# Altium PCB SLMVR_REVTT.PcbDoc
Units mil, origin at the board's own origin, x right, y up, seen from the top; angles counter-clockwise.
Board outline 1968.5 x 1968.5 mil, 2 copper layers (Top Layer, Bottom Layer); 72 components, 47 nets, 259 pads, 196 vias.
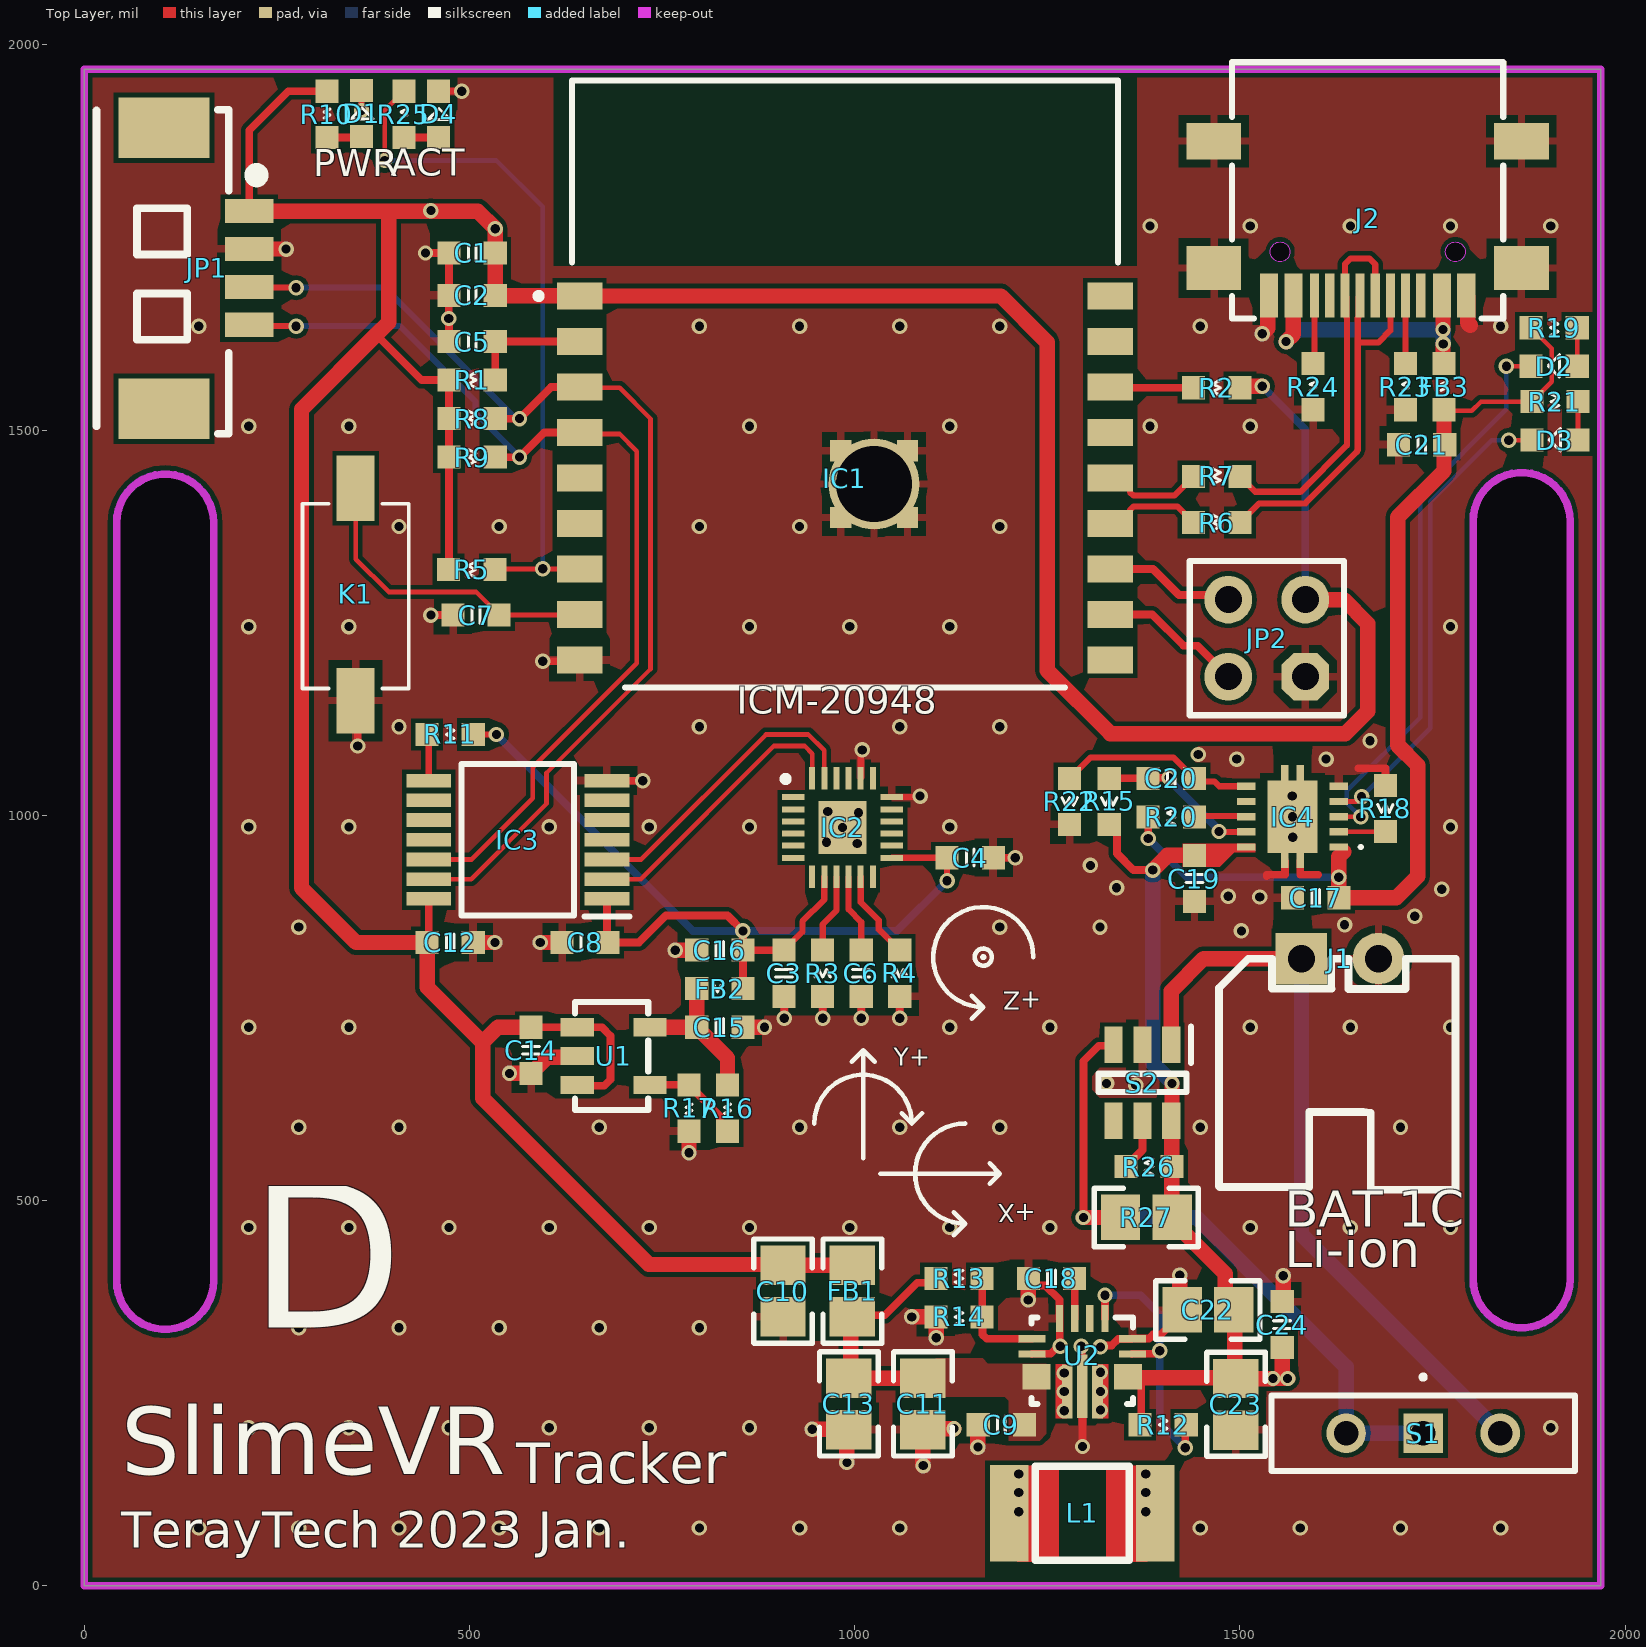
[diagram p0: Top Layer view]
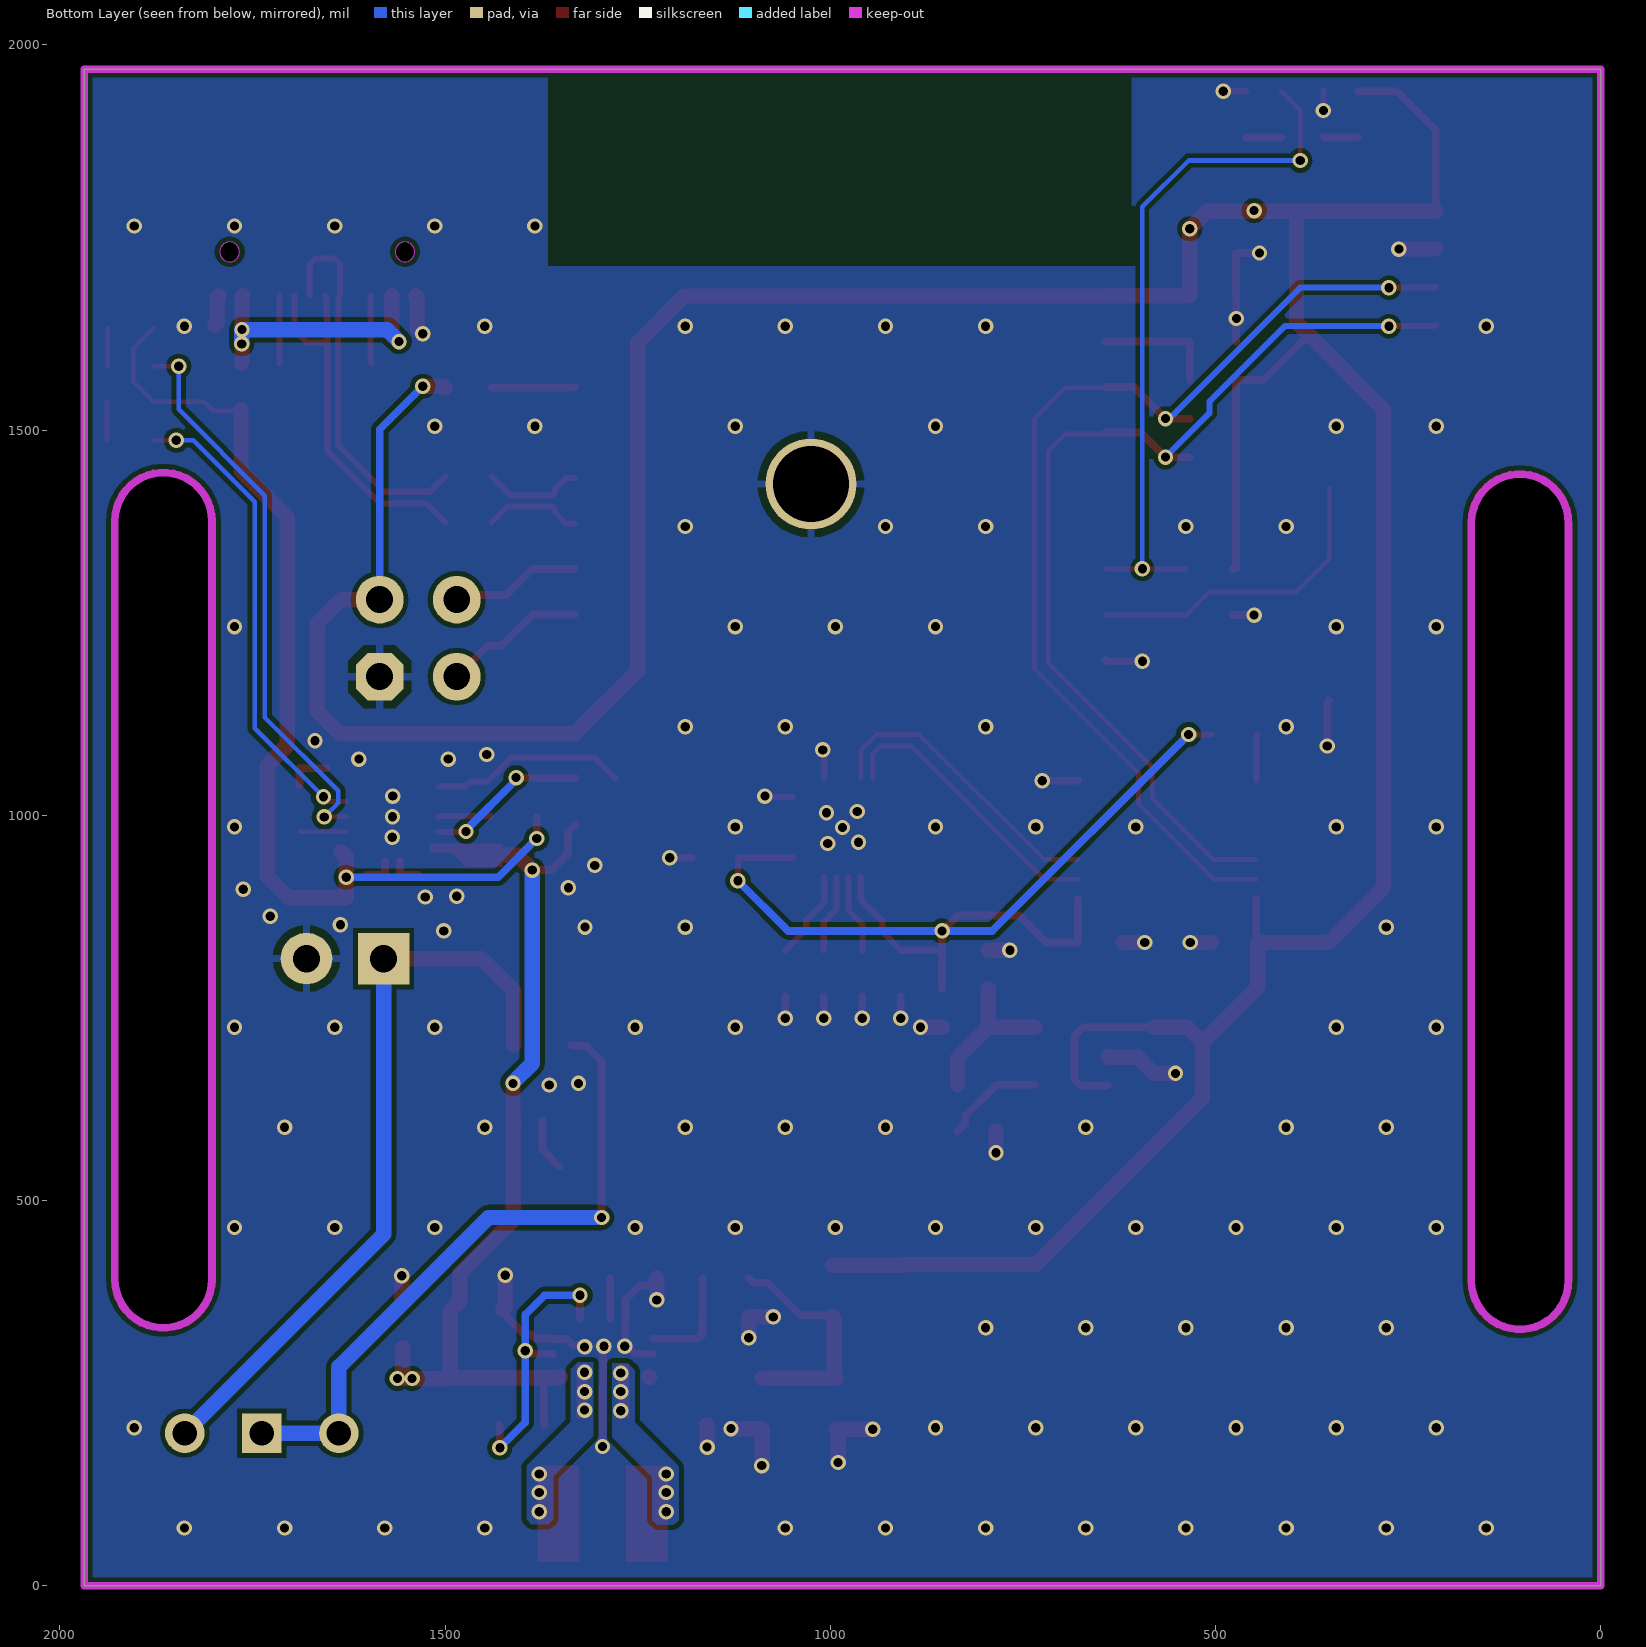
[diagram p1: Bottom Layer view, seen from below]
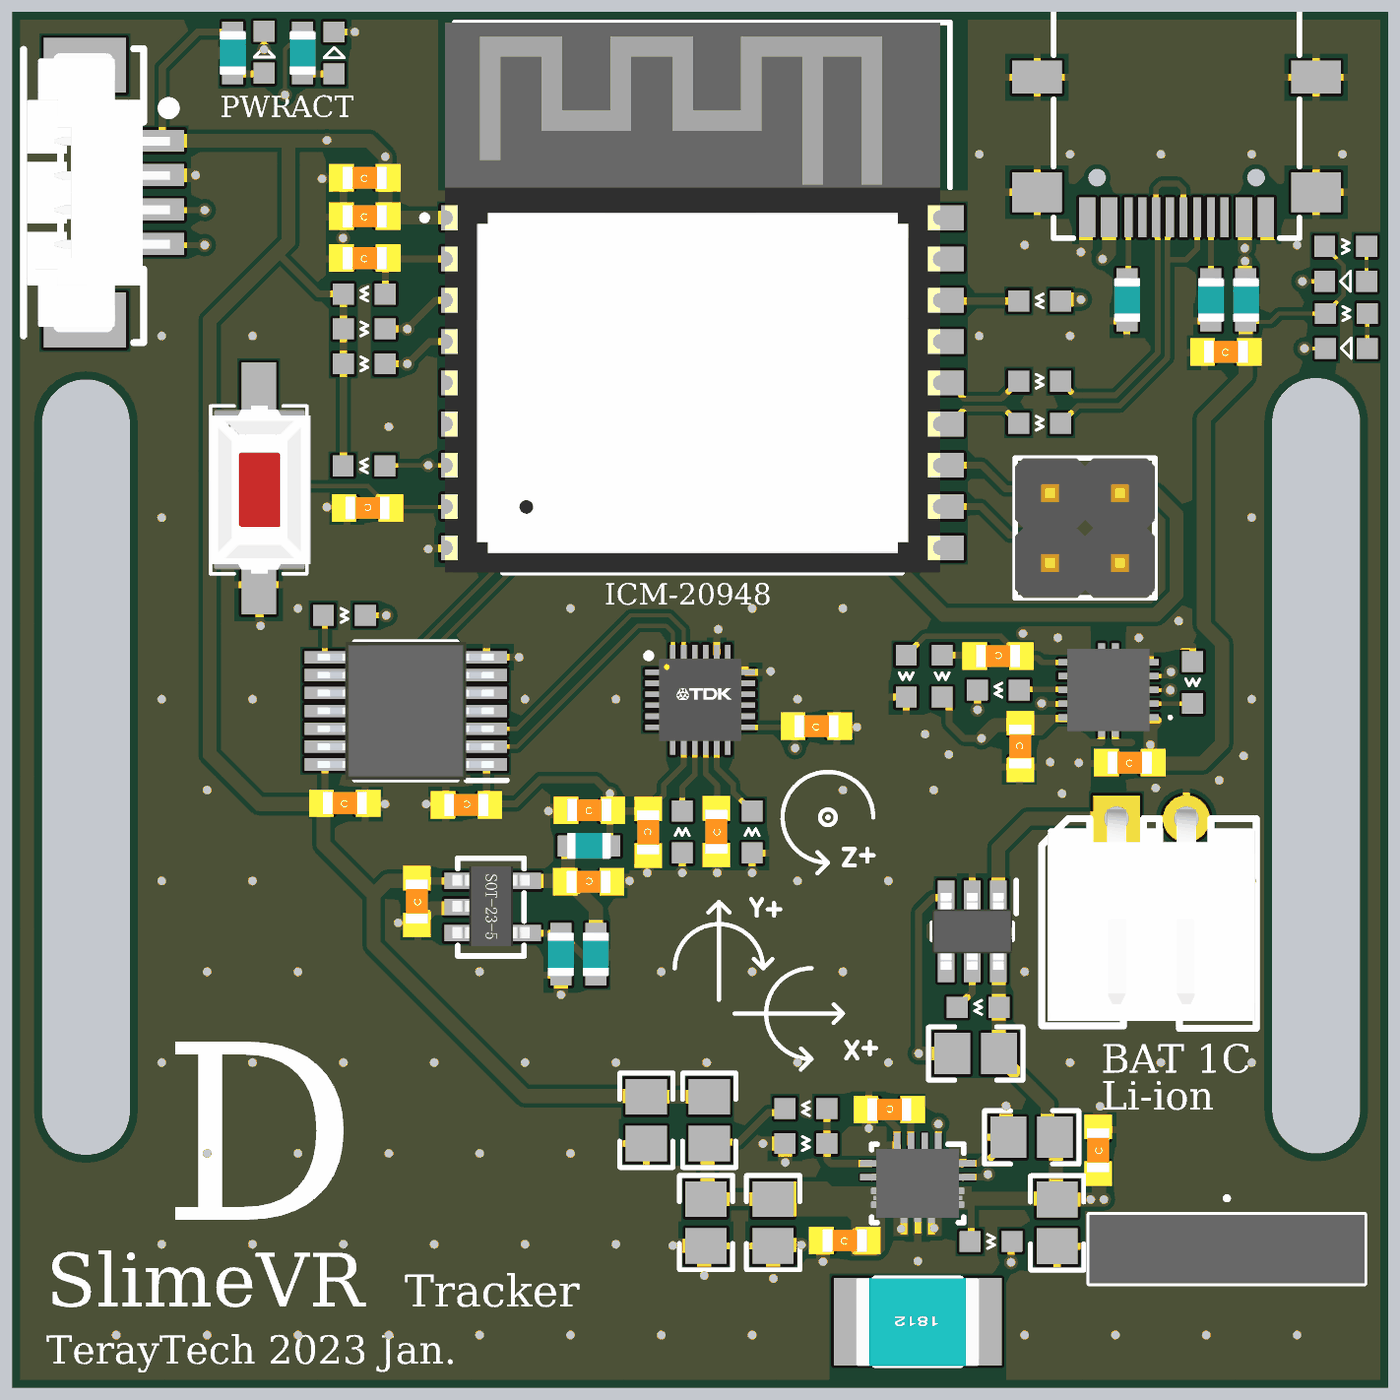
[diagram p2: 3D render of the assembled board from above, using the file's embedded part models]

## Layer stack, top to bottom
Top Solder: solder mask 0.4, Solder Resist, Dk 3.5
Top Layer: signal copper 1.4
Dielectric 1: dielectric 12.6, FR-4, Dk 4.8
Bottom Layer: signal copper 1.4
Bottom Solder: solder mask 0.4, Solder Resist, Dk 3.5

## Board outline
0,0 1968.5,0 1968.5,1968.5 0,1968.5
cut-out: 1802.8,397.7 ccw(c1865.79,397.7) 1928.78,397.7 1928.78,1381.95 ccw(c1865.79,1381.95) 1802.8,1381.95
cut-out: 42.01,395.75 ccw(c105,395.75) 167.99,395.75 167.99,1380 ccw(c105,1380) 42.01,1380

## Design rules (kind name [scope] priority, off if disabled: settings)
Clearance [All] p1: gap=6 ignorepadtopadclearanceinfootprint=TRUE except(0: Arc-Hole Track-Hole SMDPad-Hole THPad-Hole Via-Hole Fill-Hole Poly-Hole Region-Hole Text-Hole; 10: Arc-Text Track-Text SMDPad-Text THPad-Text Via-Text Fill-Text Poly-Text Region-Text Text-Text)
ComponentClearance [All] p1 off: gap=10 collisioncheckmode=3 verticalgap=10 showdistances=FALSE
PolygonConnect PolygonConnect_1VIA [IsVia] p1: connectstyle=Direct reliefconductorwidth=10 reliefentries=4 polygonreliefangle="90 Angle" airgapwidth=10
PolygonConnect [All] p2: connectstyle=Relief reliefconductorwidth=10 reliefentries=4 polygonreliefangle="90 Angle" airgapwidth=10
RoutingVias [All] p1: holewidth=28 width=50 viastyle="Through Hole" minholewidth=12 minwidth=20 maxholewidth=28 maxwidth=50
SolderMaskExpansion [All] p1: expansion=4 istentingtop=FALSE
Width [All] p1: maxlimit=20 minlimit=6 preferedwidth=10 minimp=50.000000 maximp=50.000000 favimp=50.000000
29 further rules are at their usual default settings.

## Components (designator, comment, footprint, x,y, rotation, side; value= is the part's Value field where it differs from the comment)
C1 "0.1uF" 0603_C 503.5,1730 r0 top value=104
C2 "0.1uF" 0603_C 503.5,1675 r0 top value=104
C3 "0.1uF" 0603_C 908.5,795 r270 top value=104
C4 "0.1uF" 0603_C 1150,945 r0 top value=104
C5 "1uF" 0603_C 503.5,1615 r0 top value=104
C6 "0.1uF" 0603_C 1008.5,795 r90 top value=104
C7 "0.1uF" 0603_C 508.5,1260 r180 top value=104
C8 "0.1uF" 0603_C 650,835 r180 top value=104
C9 "10uF" 0603_C 1190.5,209 r0 top value=104
C10 "10uF" 0805 907,382.46 r90 top value=104
C11 "22uF" 0805 1088.5,236 r90 top value=104
C12 "0.1uF" 0603_C 475,835 r0 top value=104
C13 "22uF" 0805 992.5,236 r90 top value=104
C14 "2.2uF" 0603_C 580,695 r90 top value=104
C15 "2.2uF" 0603_C 825,725 r180 top value=104
C16 "1uF" 0603_C 825,825 r0 top value=104
C17 "4.7uF" 0603_C 1598.5,893 r0 top value=104
C18 "0.1uF" 0603_C 1255.5,399 r180 top value=104
C19 "1uF" 0603_C 1441,918 r270 top value=104
C20 "0.47uF" 0603_C 1411,1048 r180 top value=104
C21 "2.2uF" 0603_C 1736,1481 r0 top value=104
C22 "10uF" 0805 1458.54,358 r0 top value=104
C23 "10uF" 0805 1495,235.54 r90 top value=104
C24 "1uF" 0603_C 1555,339 r90 top value=104
D1 "黄" 0603_LED 360,1910 r90 top
D2 "红" 0603_LED 1909,1583 r180 top
D3 "绿" 0603_LED 1910,1487 r180 top
D4 "蓝" 0603_LED 460,1909 r90 top
FB1 "600Ω @ 100MHz" 0805 997,382.46 r90 top
FB2 "600Ω @ 100MHz" 0603 825,775 r0 top
FB3 "600Ω @ 100MHz" 0603 1765,1556.5 r270 top
IC1 "ESP32-C3-WROOM-02-N4" ESP32C3WROOM02N4 1025.2,1430 r0 top
IC2 "ICM-20948" QFN40P300X300X105-25N-D 984.25,984.25 r0 top
IC3 "LSF0204PWR" SOP65P640X120-14N 562.79,968.35 r180 top
IC4 "BQ24060DRCT" BQ24060DRCT 1568.39,998.32 r180 top
J1 "2PIN" XH2.54-WI-2P 1630,814 r0 top
J2 "USB_TYPEC_2.0" USB_TYPEC_2.0_Horizontal_SMT 1665.96,1875.2 r180 top
JP1 "MX1.25 4PIN" "MX 1.25-WS-4P" 103.5,1710 r270 top
JP2 "Header 2.54 2x2" header2X2 1585,1180 r90 top
K1 "KEY" KEY_2 368.5,1295 r270 top
L1 "INDUCTOR" "L 1812" 1295.5,94 r180 top value=1.5uH
R1 "10K" 0603_R 503.5,1565 r0 top value=1K
R2 "10K" 0603_R 1470,1555 r0 top value=1K
R3 "10K" 0603_R 958.5,795 r270 top value=1K
R4 "10K" 0603_R 1058.5,795 r270 top value=1K
R5 "10K" 0603_R 503,1319 r0 top value=1K
R6 "0R" 0603_R 1470,1380 r180 top value=1K
R7 "0R" 0603_R 1470,1440 r180 top value=1K
R8 "4.7K" 0603_R 503.5,1515 r180 top value=1K
R9 "4.7K" 0603_R 503.5,1465 r180 top value=1K
R10 "10K" 0603 315,1910 r270 top value=1K
R11 "10K" 0603_R 475,1105 r180 top value=1K
R12 "10K" 0603_R 1400.5,209 r180 top value=1K
R13 "470K" 0603_R 1135.5,399 r0 top value=1K
R14 "150K" 0603_R 1135.5,349 r180 top value=1K
R15 "200R" 0603_R 1330.5,1018 r90 top value=1K
R16 "NC" 0603 835,620 r90 top value=1K
R17 "NC" 0603 785,620 r90 top value=1K
R18 "49.9K" 0603_R 1689,1009 r90 top value=1K
R19 "1.5K" 0603_R 1908,1633 r180 top value=1K
R20 "1K" 0603_R 1411,998 r0 top
R21 "1.5K" 0603_R 1909,1537 r180 top value=1K
R22 "1.13K" 0603_R 1279,1018 r90 top value=1K
R23 "5.1K" 0603 1715,1556.5 r270 top value=1K
R24 "5.1K" 0603 1595,1556.5 r270 top value=1K
R25 "10K" 0603 415,1910 r270 top value=1K
R26 "330R" 0603_R 1382,544 r0 top value=1K
R27 "NC" 0805 1378.54,478 r0 top value=1K
S1 "BSI-10" BSI10 1738,198 r180 top
S2 "TPS22810DBVR" SOT95P280X145-6N 1373.6,652.79 r270 top
U1 "RF LDO" SOT-23-5 689.98,688.5 r270 top
U2 "TPS63070RNMR" RNM0015A 1295.5,292 r270 top value=Value

## Footprints (in the part's own frame and the unit in brackets; to place one, negate y for a bottom-side part, rotate by r counter-clockwise, add the part's x,y. Pads: shape width x height; smd on the part's side, far side on the other; paste and mask are expansions set on the pad)
0603 [mil]
  rect 30x30 smd: 1(-30,0) 2(30,0)
  silkscreen extent -7,-4 5,4, body extent -31,-18 31,19, height 34
0603_C [mil] "Capacitor"
  rect 30x30 smd: 1(-30,0) 2(30,0)
  silkscreen extent -5,-11 5,11, body extent -51,-18 52,21, height 35
0603_LED [mil]
  rect 30x30 smd: 1(31,0) 2(-29,0)
  silkscreen extent -6,-15 9,14, body extent -31,-16 31,16, height 24
0603_R [mil]
  rect 30x30 smd: 1(-30,0) 2(30,0)
  silkscreen extent -5,-10 5,10, body extent -34,-19 34,19, height 39
0805 [mm] "0805 from SM-752 data"
  rect 1.3x1.5 smd: 1(-0.85,0) 2(0.85,0)
  silkscreen extent -1.72,-0.97 1.72,0.97, body extent -1.1,-0.72 1.1,0.72, height 1.45
BQ24060DRCT [mm]
  rect 0.6x0.24 smd: 1(-1.527,1) 2(-1.527,0.5) 3(-1.527,0) 4(-1.527,-0.5) 5(-1.527,-1) 6(1.527,-1) 7(1.527,-0.5) 8(1.527,0) 9(1.527,0.5) 10(1.527,1)
  rect 1.65x2.4 smd: 11(0,0)
  rect 0.25x0.5 smd: 12(-0.25,-1.45) 13(0.25,-1.45) 14(0.25,1.45) 15(-0.25,1.45)
  silkscreen extent -2.3,0.95 -2.2,1.05, body extent -1.5,-1.5 1.5,1.5, height 1.1
BSI10 [mm]
  rect 1.3x1.3 hole 0.8: 1(0,0)
  round 1.3 hole 0.8: 2(2.54,0) 3(-2.54,0)
  silkscreen extent -5,-1.9 5,1.25, body extent -5,-1.25 5,1.25, height 6.5
ESP32C3WROOM02N4 [mm]
  rect 1.5x0.9 smd: 1(-9.71,6.2) 2(-9.71,4.7) 3(-9.71,3.2) 4(-9.71,1.7) 5(-9.71,0.2) 6(-9.71,-1.3) 7(-9.71,-2.8) 8(-9.71,-4.3) 9(-9.71,-5.8) 10(7.79,-5.8) 11(7.79,-4.3) 12(7.79,-2.8) 13(7.79,-1.3) 14(7.79,0.2) 15(7.79,1.7) 16(7.79,3.2) 17(7.79,4.7) 18(7.79,6.2)
  rect 0.7x0.7 smd: 19(0,0) 20(1.1,0) 21(1.1,1.1) 22(0,1.1) 23(-1.1,1.1) 24(-1.1,0) 25(-1.1,-1.1) 26(0,-1.1) 27(1.1,-1.1)
  silkscreen extent -11.16,-6.7 8.04,13.3, body extent -10.31,-6.7 7.69,13.3, height 3.2
header2X2 [mil]
  oct 62x62 hole 35: 1(0,0)
  round 62 hole 35: 2(0,100) 3(100,0) 4(100,100)
  silkscreen extent -50,-50 150,150, body extent -50,-50 150,150, height 398
KEY_2 [mil] "贴片"
  rect 85x49.37 smd: 1(-129.57,-16.14) 2(146.02,-16.14)
  silkscreen extent -110,-85 130,53, body extent -110,-88 130,58
"L 1812" [mil] "小功率贴片电感"
  rect 50x125 smd: 1(-95,0) 2(95,0)
  silkscreen extent -61,-61 61,61, body extent -89,-63 89,63, height 59
"MX 1.25-WS-4P" [mm] "长：10.15mm，宽：4.2mm，高：3.4mm"
  rect 2x3 smd: 0(-4.632,0) 0(4.632,0)
  rect 0.8x1.6 smd: 1(-1.889,2.811) 2(-0.639,2.811) 3(0.611,2.811) 4(1.861,2.811)
  silkscreen extent -5.23,-2.23 5.45,3.25, body extent -5.07,-2.1 5.07,3.09, height 3.4
QFN40P300X300X105-25N-D [mm]
  rect 0.75x0.2 smd: 1(-1.627,1) 2(-1.627,0.6) 3(-1.627,0.2) 4(-1.627,-0.2) 5(-1.627,-0.6) 6(-1.627,-1) 13(1.627,-1) 14(1.627,-0.6) 15(1.627,-0.2) 16(1.627,0.2) 17(1.627,0.6) 18(1.627,1)
  rect 0.2x0.75 smd: 7(-1,-1.627) 8(-0.6,-1.627) 9(-0.2,-1.627) 10(0.2,-1.627) 11(0.6,-1.627) 12(1,-1.627) 19(1,1.627) 20(0.6,1.627) 21(0.2,1.627) 22(-0.2,1.627) 23(-0.6,1.627) 24(-1,1.627)
  rect 1.59x1.75 smd: 25(0,0)
  silkscreen extent -1.97,1.5 -1.78,1.7, body extent -1.5,-1.5 1.5,1.5, height 0.98
RNM0015A [mm]
  rect 0.889x0.24 smd paste+0 mask+0.051: 1(-1.397,0.75) 2(-1.397,0.25) 3(-1.397,-0.25) 4(-1.397,-0.75)
  rect 0.24x0.889 smd paste+0 mask+0.051: 5(-0.725,-1.651) 6(-0.225,-1.651) 14(-0.225,1.651) 15(-0.725,1.651)
  rect 0.85x0.7 smd paste-0.35 mask-0.356: 7(0.525,-1.4) 12(0.525,1.4)
  rect 0.85x0.889 smd paste-0.35 mask-0.356: 8(0.525,-1.524) 13(0.525,1.524)
  rect 1.778x0.35 smd paste-0.712 mask-0.051: 9(1.016,-0.5) 11(1.016,0.5)
  rect 2.083x0.343 smd paste-0.887 mask-0.051: 10(0.838,0)
  silkscreen extent -1.43,-1.68 1.43,1.68, body extent -1.25,-1.5 1.25,1.5, height 1.1
SOP65P640X120-14N [mm]
  rect 1.475x0.45 smd: 1(-2.938,1.95) 2(-2.938,1.3) 3(-2.938,0.65) 4(-2.938,0) 5(-2.938,-0.65) 6(-2.938,-1.3) 7(-2.938,-1.95) 8(2.938,-1.95) 9(2.938,-1.3) 10(2.938,-0.65) 11(2.938,0) 12(2.938,0.65) 13(2.938,1.3) 14(2.938,1.95)
  silkscreen extent -3.67,-2.5 1.85,2.52, body extent -3.2,-2.5 3.2,2.5, height 1.2
SOT95P280X145-6N [mm]
  rect 1.2x0.6 smd: 1(-1.25,0.95) 2(-1.25,0) 3(-1.25,-0.95) 4(1.25,-0.95) 5(1.25,0) 6(1.25,0.95)
  silkscreen extent -1.85,-1.45 0.3,1.6, body extent -1.4,-1.45 1.4,1.45, height 1.2
SOT-23-5 [mm]
  rect 0.6x1.1 smd: 1(-0.926,-1.273) 2(0.024,-1.273) 3(0.974,-1.273) 4(0.974,1.127) 5(-0.926,1.127)
  silkscreen extent -1.75,-1.34 1.8,1.07, body extent -1.45,-1.53 1.45,1.27, height 1.2
USB_TYPEC_2.0_Horizontal_SMT [mm]
  rect 0.6x1.45 smd: A1(-3.25,5.095) A4(-2.45,5.095) A9(2.45,5.095) A12(3.25,5.095)
  rect 0.3x1.45 smd: A5(-1.25,5.095) A6(-0.25,5.095) A7(0.25,5.095) A8(1.25,5.095) B5(1.75,5.095) B6(0.75,5.095) B7(-0.75,5.095) B8(-1.75,5.095)
  rect 1.8x1.45 smd: Shell(-5.07,4.18) Shell(5.07,4.18)
  rect 1.8x1.2 smd: Shell(-5.07,0) Shell(5.07,0)
  Keep-Out Layer board cut-out: 2.89,3.325 2.766,3.35 2.66,3.42 2.59,3.526 2.565,3.65 2.565,3.65 2.59,3.774 2.66,3.88 2.766,3.95 2.89,3.975 2.89,3.975 3.014,3.95 3.12,3.88 3.19,3.774 3.215,3.65 3.215,3.65 3.19,3.526 3.12,3.42 3.014,3.35 2.89,3.325
  Keep-Out Layer board cut-out: -2.89,3.325 -3.014,3.35 -3.12,3.42 -3.19,3.526 -3.215,3.65 -3.215,3.65 -3.19,3.774 -3.12,3.88 -3.014,3.95 -2.89,3.975 -2.89,3.975 -2.766,3.95 -2.66,3.88 -2.59,3.774 -2.565,3.65 -2.565,3.65 -2.59,3.526 -2.66,3.42 -2.766,3.35 -2.89,3.325
  silkscreen extent -4.47,-2.6 4.47,5.85
XH2.54-WI-2P [mm] "接插件，2P"
  rect 1.7x1.7 hole 0.9: 1(-1.27,0)
  round 1.7 hole 0.9: 2(1.27,0)
  silkscreen extent -3.99,-7.62 3.81,0, body extent -3.77,-7.35 3.77,0.35, height 5.73

## Part data
C1 C2 C3 C4 C5 C6 C7 C8 C9 C10 C11 C12 C13 C14 C15 C16 C17 C18 C19 C20 C21 C22 C23 C24: library part CAP, "Capacitor", LatestRevisionDate=17-Jul-2002, LatestRevisionNote="Re-released for DXP Platform.", PackageReference=RAD-0.3, Published=8-Jun-2000, Publisher="Altium Limited"
D1 D2 D3 D4: library part LED, "LED 发光二极管"
FB1 FB2 FB3: library part FB, "磁珠 600Ω @ 100MHz"
IC1: "Integrated Circuit", Manufacturer_Name="Espressif Systems", Mouser Part Number=356-ESP32C3WROOM02N4, Datasheet Link=https://www.mouser.ch/datasheet/2/891/Espressif_ESP32_C3_WROOM_02-2006871.pdf, Height=3.35mm, Manufacturer_Part_Number=ESP32-C3-WROOM-02-N4, Mouser Price/Stock=https://www.mouser.co.uk/ProductDetail/Espressif-Systems/ESP32-C3-WROOM-02-N4?qs=stqOd1AaK7%2FqjTZKEOgfUg%3D%3D
IC2: "Integrated Circuit", Manufacturer_Name=TDK, Mouser Part Number=410-ICM-20948, Arrow Part Number=ICM-20948, Arrow Price/Stock=https://www.arrow.com/en/products/icm-20948/invensense?region=nac, Datasheet Link=https://product.tdk.com/system/files/dam/doc/product/sensor/mortion-inertial/imu/data_sheet/ds-000189-icm-20948-v1.3.pdf, Height=1.05mm, Manufacturer_Part_Number=ICM-20948, Mouser Price/Stock=https://www.mouser.co.uk/ProductDetail/TDK-InvenSense/ICM-20948?qs=u4fy%2FsgLU9OtGc31yF%2Friw%3D%3D
IC3: "Integrated Circuit", Manufacturer_Name="Texas Instruments", Mouser Part Number=595-LSF0204PWR, Arrow Part Number=LSF0204PWR, Arrow Price/Stock=https://www.arrow.com/en/products/lsf0204pwr/texas-instruments?region=nac, Datasheet Link=http://www.ti.com/lit/gpn/lsf0204, Height=1.2mm, Manufacturer_Part_Number=LSF0204PWR, Mouser Price/Stock=https://www.mouser.co.uk/ProductDetail/Texas-Instruments/LSF0204PWR?qs=m%2F7bTylgptck0MkFZrWcVg%3D%3D
IC4: "Integrated Circuit", Manufacturer_Name="Texas Instruments", Datasheet Link=https://www.ti.com/lit/gpn/bq24060, Height=1mm, Manufacturer_Part_Number=BQ24060DRCT
J1: library part "HEADER 2PIN"
J2: "USB 3.1 Type C Receptacle WR-COM, Horizontal, SMT / THT", Contact Resistance="30 mOhm", Operating Temperature="-40 to 105 degC", Part Number=632723300011, Rated Current="5 A", Working Voltage="20 VDC", ComponentLink1Description=Manufacturer, ComponentLink1URL=http://www.we-online.de, ComponentLink2Description=Datasheet, ComponentLink2URL=https://katalog.we-online.de/em/datasheet/632723x00011%282%29.pdf, Connector Type="USB 3.1 Type C", Gender=Receptacle, Mounting Technology="SMT / THT", Orientation=Horizontal, Packaging="Tape and Reel", Published Date="September 2018", Publisher="Wurth Elektronik"
JP1: library part "HEADER 4"
JP2: library part "HEADER 2X2"
K1: library part KEY_2, "Switch", LatestRevisionDate=17-Jul-2002, LatestRevisionNote="Re-released for DXP Platform.", PackageReference=SPST-2, Published=24-Mar-1999, Publisher="Altium Limited"
L1: "电感", Code_IEC=1005, Code_JEITA=0402, LatestRevisionDate=17-Jul-2002, LatestRevisionNote="Re-released for DXP Platform.", PackageReference=0402-A, Published=8-Jun-2000, Publisher="Altium Limited"
R1 R2 R3 R4 R5 R6 R7 R8 R9 R10 R11 R12 R13 R14 R15 R16 R17 R18 R19 R20 R21 R22 R23 R24 R25 R26 R27: library part RES, "Resistor", Published=8-Jun-2000, Publisher="Altium Limited", Revision="July-2002: Re-released for DXP Platform."
S1: "Switch", Manufacturer_Name=Sungmun, Datasheet Link=https://datasheet.datasheetarchive.com/originals/distributors/Datasheets-2/DSA-20618.pdf, Height=6.4mm, Manufacturer_Part_Number=BSI-10
S2: "Switch", Manufacturer_Name="Texas Instruments", Mouser Part Number=595-TPS22810DBVR, Arrow Part Number=TPS22810DBVR, Arrow Price/Stock=https://www.arrow.com/en/products/tps22810dbvr/texas-instruments?region=nac, Datasheet Link=http://www.ti.com/lit/gpn/tps22810, Height=1.45mm, Manufacturer_Part_Number=TPS22810DBVR, Mouser Price/Stock=https://www.mouser.co.uk/ProductDetail/Texas-Instruments/TPS22810DBVR?qs=34RfhUjJmKcFqeJVMZZhPA%3D%3D
U1: library part ADP150
U2: "Imported", Manufacturer="Texas Instruments", PartNumber=TPS63070RNMR, RefDes=RefDes, Type=TYPE

## Free pads (board coordinates)
  round 118.11 hole 98.43: 2(1025.2,1430)

## Via types
v1: diameter 20, hole 12, Top Layer to Bottom Layer, tented both sides, 196 vias

## Nets (pads, with @x,y where several pads share a name; then routed paths per layer and width w, separated by ;. In a path a pad name is that pad's centre, name@x,y a point inside that pad or via, vN(x,y) a via of type N, cw(c..) or ccw(c..) an arc to the next point about the centre after c; other vN are vias at no path point)
bat: J1.1 S1.3 S2.1 | length 979.3
  Top Layer w20: S2.1 1411,772 1453,814 J1.1
  Bottom Layer w20: J1.1 1580,456 S1.3
BOOT: C7.1 IC1.8 K1.1 | length 412.9
  Top Layer w6: K1.1 352.36,1332.64 395,1290 508.5,1290 C7.1 642.2,1260 IC1.8
GND: C1.1 C2.1 C3.2 C4.2 C5.1 C6.1 C7.2 C8.2 C9.1 C10.1 C11.1 C12.2 C13.1 C14.1 C15.1 C16.1 C17.1 C18.2 C19.2 C21.1 C22.1 C23.1 C24.2 D1.1 D4.1 IC1.9 IC1.19 IC1.20 IC1.21 IC1.22 IC1.23 IC1.24 IC1.25 IC1.26 IC1.27 IC2.18 IC2.20 IC2.25 IC3.7 IC4.5 IC4.11 IC4.12 IC4.13 IC4.14 IC4.15 J1.2 J2.A1 J2.A12 J2.Shell JP1.2 JP2.1 K1.2 pad.2 R3.2 R4.2 R14.2 R17.1 R18.2 R22.1 R23.2 R24.2 S2.2 U1.2 U2.4 U2.6 U2.10 U2.15 | length 1911.6
  Top Layer w8: v1(360,1915) D1.1 ; D4.1 v1(490,1940) ; IC2.20 1007.94,1048.37 1007.94,1082.94 v1(1010,1085) ; IC2.18 1048.37,1023.69 1083.69,1023.69 v1(1085,1025)
  Top Layer w10: v1(262,1735) v1@262,1735.15 ; K1.2 355,1146.34 v1(355,1090) ; v1(443,1730) C1.1 C2.1 473,1675 v1(473,1645) 473.5,1645 C5.1 ; v1(450,1260) C7.2 ; v1(595,1200) 641.26,1200 IC1.9 ; IC3.7 IC3.7 724.94,1045.06 v1(725,1045) ; v1(908.5,736.5) C3.2 ; v1(958.5,736.5) R3.2 ; v1(1008.5,736.5) C6.1 ; v1(1058.5,736.5) R4.2 ; C4.2 v1(1208.5,945) ; C18.2 1234.86,389.64 1247.36,389.64 1265.98,371.03 U2.4 1266.25,346.72 1266.25,311.75 1265.04,311.75 1254.43,301.13 1230.78,301.13 U2.6 ; v1(1294,311) 1294.75,310.25 1294.75,259.75 U2.10 1295.75,258.75 v1(1295.75,180.75) ; v1(1319,310) 1320.91,311.91 1333.78,311.91 1342.13,320.27 1360.23,320.27 U2.15 1360.78,320.82 1382.12,320.82 1387.3,326 1397.01,326 1425.07,354.06 C22.1 ; 1535,921 1535,922.95 1558.54,922.95 IC4.14 ; IC4.15 1578.23,922.95 1601.77,922.95 ; 1654,1061 1689,1061 R18.2
  Top Layer w20: JP1.2 v1@262,1735.15 ; C12.2 v1(533,835) ; v1(552,665) C14.1 600.75,685.75 638.05,685.75 U1.2 ; v1(592,835) C8.2 ; v1(767,825) C16.1 ; v1(785,562) R17.1 ; C15.1 v1(883,725) ; v1(945,203) 992.04,203 C13.1 990,200.03 v1(990,160) ; v1(1074,349) R14.2 1106,348.5 v1(1106,322) ; v1(1089,156) 1088.5,156.5 C11.1 1089.97,204 v1(1129,204) ; v1(1160,180) 1160,208.5 C9.1 ; v1(1225.5,371) C18.2 ; v1(1422,403) 1422,361.07 C22.1 ; v1(1529,1625) 1536.2,1632.2 1536.2,1672.8 J2.A12 ; C24.2 1556.38,370.38 v1(1556.38,402.38) ; J2.A1 1795.72,1672.8 1795.72,1639.25 1798.91,1636.06
  other v1: 148.5,75 278.5,75 408.5,75 538.5,75 668.5,75 798.5,75 928.5,75 1058.5,75 1448.5,75 1578.5,75 1708.5,75 1838.5,75 213.5,205 343.5,205 473.5,205 603.5,205 733.5,205 863.5,205 1903.5,205 1267,311 278.5,335 408.5,335 538.5,335 668.5,335 798.5,335 213.5,465 343.5,465 473.5,465 603.5,465 733.5,465 863.5,465 993.5,465 1123.5,465 1253.5,465 1513.5,465 1643.5,465 1773.5,465 278.5,595 408.5,595 668.5,595 928.5,595 1058.5,595 1188.5,595 1448.5,595 1708.5,595 1365,650 1327,652 213.5,725 343.5,725 1123.5,725 1253.5,725 1513.5,725 1643.5,725 1773.5,725 1502,850 278.5,855 1188.5,855 1318.5,855 1636,858 1727,869 1526,894 1485,895 1762,904 1340,906 1306,935 1003.5,963.5 963.5,965 1568.77,971.63 984.25,984.25 213.5,985 343.5,985 603.5,985 733.5,985 863.5,985 1123.5,985 1773.5,985 1568.39,998.32 1005,1003.5 965,1005 1568,1025 1496,1073 1612,1073 1446,1079 1669,1097 408.5,1115 798.5,1115 1058.5,1115 1188.5,1115 213.5,1245 343.5,1245 863.5,1245 993.5,1245 1123.5,1245 1773.5,1245 408.5,1375 538.5,1375 798.5,1375 928.5,1375 1188.5,1375 213.5,1505 343.5,1505 863.5,1505 1123.5,1505 1383.5,1505 1513.5,1505 148.5,1635 798.5,1635 928.5,1635 1058.5,1635 1188.5,1635 1448.5,1635 1838.5,1635 1383.5,1765 1513.5,1765 1643.5,1765 1773.5,1765 1903.5,1765
LED: IC1.7 R5.2 R25.1 | length 904.7
  Top Layer w6: v1(390,1850) 390,1915 R25.1 ; R5.2@538.5,1320 538.74,1319.76 595,1319.76 IC1.7
  Bottom Layer w6: v1(390,1850) 535,1850 595,1790 v1(595,1320)
NetC5_2: C5.2 IC1.2 R1.2 | length 159.4
  Top Layer w10: R1.2 C5.2 IC1.2 IC1.2
NetC6_2: C6.2 IC2.10 | length 102
  Top Layer w8: IC2.10 992.13,877.87 1008.5,861.5 C6.2
NetC9_2: C9.2 C11.2 C13.2 FB1.1 R13.1 U2.7 U2.8 | length 307.9
  Top Layer w10: FB1.1 999,351 1039,351 1081.36,393.36 1099.87,393.36 R13.1
  Top Layer w20: FB1.1 994.75,346.75 994.75,271.71 C13.2 C11.2 ; U2.7@1234.57,270.4 U2.8
NetC15_2: C15.2 FB2.1 R16.2 U1.5 | length 202.2
  Top Layer w20: U1.5@734.37,724.98 C15.2 ; FB2.1 C15.2 ; R16.2 835,685 C15.2
NetC18_1: C18.1 U2.3 | length 52.1
  Top Layer w10: C18.1 1285.66,398.84 U2.3
NetC20_1: C20.1 IC4.6 R22.2 | length 255.9
  Top Layer w8: R22.2 1306,1075 1414,1075 C20.1 1445,1044 1467,1044 1473.31,1037.69 IC4.6
NetC20_2: C20.2 IC4.9 R15.2 | length 212.5
  Top Layer w8: v1(1473,979) 1473.65,978.35 1507.99,978.35 IC4.9
  Top Layer w10: R15.2 C20.2 1380,1049 v1(1408,1049)
  Bottom Layer w10: v1(1408,1049) 1408,1046 1473,981 v1(1473,979)
NetD1_2: D1.2 R10.2 | length 45.4
  Top Layer w10: R10.2 359,1880 D1.2
NetD2_1: D2.1 IC4.3 | length 738.8
  Top Layer w6: IC4.3 1628.66,998.16 1656.84,998.16 v1(1657,998) ; v1(1846,1583) D2.1
  Bottom Layer w6: v1(1657,998) 1639,1016 1639,1032 1734,1127 1734,1415 1846,1527 v1(1846,1583)
NetD2_2: D2.2 R19.1 | length 50
  Top Layer w6: D2.2 R19.1
NetD3_1: D3.1 IC4.4 | length 617
  Top Layer w6: IC4.4 1652,1018 v1(1658,1024) ; v1(1849,1487) D3.1
  Bottom Layer w6: v1(1658,1024) 1747,1113 1747,1407 1827,1487 v1(1849,1487)
NetD3_2: D3.2 R21.1 | length 50
  Top Layer w6: D3.2 R21.1
NetD4_2: D4.2 R25.2 | length 45
  Top Layer w10: R25.2 D4.2
NetFB3_1: FB3.1 J2.A4 J2.A9 | length 363
  Top Layer w20: v1(1560,1615) 1569.5,1624.5 J2.A9 ; J2.A4 1763.71,1673.32 v1(1763.71,1630.55) ; v1@1763.71,1612 1763.71,1587.79 FB3.1
  Bottom Layer w20: v1(1560,1615) 1575.55,1630.55 v1(1763.71,1630.55) 1764,1630.26 v1(1764,1612)
NetIC1_13: IC1.13 R6.2 | length 128.2
  Top Layer w8: IC1.13 1343.7,1378.82 1357.42,1392.54 1357.42,1396.31 1362.1,1401 1419,1401 R6.2
NetIC1_14: IC1.14 R7.2 | length 130.6
  Top Layer w8: IC1.14 1343.7,1437.87 1357.42,1424.16 1357.42,1419.69 1362.1,1415 1415,1415 R7.2
NetIC1_16: IC1.16 R2.1 | length 108.5
  Top Layer w10: IC1.16 1332.87,1555 R2.1
NetIC2_9: IC2.9 R3.1 | length 102.6
  Top Layer w8: R3.1 958.5,858.5 976.38,876.38 IC2.9
NetIC2_11: IC2.11 R4.1 | length 116.2
  Top Layer w8: IC2.11 1007.87,887.13 1031.25,863.75 1031.25,852.25 R4.1
NetIC3_8: IC3.8 R11.2 | length 60.8
  Top Layer w8: R11.2 447.12,1102.88 IC3.8
NetIC4_2: IC4.2 R18.1 | length 60.6
  Top Layer w6: IC4.2 1688.63,978.63 R18.1
NetIC4_8: IC4.8 R20.2 | length 68
  Top Layer w8: R20.2 1442,999 1507.58,999 IC4.8
NetJ2_A5: J2.A5 R23.1 | length 88.2
  Top Layer w8: R23.1 1715.17,1586.67 J2.A5
NetJ2_B5: J2.B5 R24.1 | length 89
  Top Layer w8: R24.1 1597.06,1588.56 J2.B5
NetL1_1: L1.1 U2.11
  other v1: 1378.01,96 1378.01,121 1378.01,145 1319.01,228 1319.01,252 1319.01,277
NetL1_2: L1.2 U2.9
  other v1: 1213,96 1213,121 1213,145 1272,227 1272,252 1272,276
NetR12_1: R12.1 U2.1 U2.14 | length 365.9
  Top Layer w10: U2.1 v1(1325,377) ; U2.14 1360.78,301.13 1389.43,301.13 1393.29,305 v1(1396,305) ; v1(1429,179) 1429,207.5 R12.1
  Bottom Layer w10: v1(1325,377) 1371,377 1396,352 v1(1396,305) 1396,212 v1(1429,179)
NetR13_2: R13.2 R14.1 U2.5 | length 140
  Top Layer w10: R13.2 R14.1 1166,348.5 1166,326 1171.46,320.54 U2.5
NetR16_1: R16.1 R17.2 U1.4 | length 131.4
  Top Layer w10: U1.4 784.84,650.16 R17.2 825,610 825,600 R16.1
NetR26_1: R26.1 S2.5 | length 68.5
  Top Layer w10: R26.1 1373.6,565.6 S2.5
NetR27_1: R27.1 S1.1 S1.2 S2.3 | length 906.3
  Top Layer w10: v1(1297,478) 1297,681 1317,701 1335.2,701 S2.3
  Top Layer w20: v1(1297,478) R27.1
  Bottom Layer w20: v1(1297,478) 1444,478 1638,284 S1.2 S1.1
P1.8V: C3.1 C4.1 C8.1 C16.2 FB2.2 IC2.8 IC2.13 IC3.1 R11.1 | length 1349.6
  Top Layer w8: R11.1 v1(535,1105) ; C3.1 932.25,848.75 932.25,862.25 960.63,890.63 IC2.8 ; IC2.13 1119.88,944.88 C4.1 v1(1120,915)
  Top Layer w10: IC3.1 678.46,836.54 C8.1 720,835 755,870 835,870 v1(855,850) C16.2 ; FB2.2 C16.2 ; C3.1 C16.2
  Bottom Layer w10: v1(535,1105) 790,850 v1(855,850) 1055,850 v1(1120,915)
P3.3V: C1.2 C2.2 C10.2 C12.1 C14.2 FB1.2 IC1.1 IC3.14 JP1.1 JP2.3 R1.1 R2.2 R5.1 R8.2 R9.2 R10.1 U1.1 U1.3 | length 5438.7
  Top Layer w10: JP1.1 214.16,1889.16 265,1940 R10.1 ; 379,1624 438,1565 R1.1 R8.2 R9.2 473.5,1320 R5.1@478.5,1320 ; C12.1 447.12,837.12 IC3.14 ; C14.2 C14.2 U1.1 672.04,724.96 683,714 683,657 675,649 641.02,649 U1.3
  Top Layer w20: JP1.1 395,1784.36 ; C14.2 537,725 517,705 ; C10.2 FB1.2 ; C10.2@908,417 733,417 517,633 517,705 ; R2.2 1502,1557 v1(1529,1557) ; JP2.3 1635,1280 1666,1249 1666,1135 1637,1106 1332,1106 1250,1188 1250,1614 1189.91,1674.09 IC1.1 642.46,1674.55 533.96,1674.55 C2.2 C1.2 v1(533.5,1761.5) 510.64,1784.36 395,1784.36 ; 395,1784.36 395,1640 379,1624 282,1527 282,906 353,835 C12.1 445,777 517,705
  Bottom Layer w10: v1(1529,1557) 1585,1501 JP2.3
  other v1: 450,1785
P5V: C17.2 C21.2 FB3.2 IC4.1 R19.2 R20.1 R21.2 | length 1351.8
  Top Layer w6: FB3.2 1766.5,1525 1801,1525 1813,1537 R21.2 1905,1563 1905,1606 R19.2
  Top Layer w10: v1(1381,970) R20.1
  Top Layer w20: 1635,953 1628.5,946.5 v1(1628.5,919.75) C17.2 1703,893 1731,921 1731,1065 1705,1091 1705,1387 1765,1447 FB3.2
  Bottom Layer w10: v1(1381,970) 1431.25,919.75 v1(1628.5,919.75)
RXD: IC1.11 JP2.2 | length 186.5
  Top Layer w10: IC1.11 1386.29,1260.71 1427,1220 1445,1220 JP2.2
SCL: IC1.4 IC3.12 JP1.4 R9.1 | length 1312.3
  Top Layer w6: IC3.12 502.76,942.76 582.32,1022.32 582.32,1062.32 717.32,1197.32 717.32,1472.68 695,1495 644.84,1495 IC1.4
  Top Layer w8: JP1.4 215.88,1635 v1(275,1635)
  Top Layer w10: R9.1 v1(565,1465) 596.93,1496.93 IC1.4
  Bottom Layer w8: v1(275,1635) 410,1635 507.99,1537.01 507.99,1522.01 v1(565,1465)
SCL_REG: IC2.23 IC3.3 | length 394
  Top Layer w6: IC3.3 722.76,942.76 885,1105 940,1105 960.63,1084.37 IC2.23
SDA: IC1.3 IC3.13 JP1.3 R8.1 | length 1406.4
  Top Layer w6: IC3.13 502.17,917.17 600,1015 600,1055 735,1190 735,1515 695,1555 643.9,1555 IC1.3
  Top Layer w8: JP1.3 215.09,1685 v1(275,1685)
  Top Layer w10: R8.1 v1(565,1515) 605.98,1555.98 IC1.3
  Bottom Layer w8: v1(275,1685) 390,1685 560,1515 v1(565,1515)
SDA_REG: IC2.24 IC3.2 | length 374
  Top Layer w6: IC3.2 722.17,917.17 895,1090 935,1090 945,1080 945,1048.43 IC2.24
TXD: IC1.12 JP2.4 | length 169.6
  Top Layer w10: IC1.12 1387.24,1319.76 1421,1286 1479,1286 JP2.4
USB_D_N: J2.A7 J2.B7 R6.1 | length 488.4
  Top Layer w8: R6.1 1525,1405 1585,1405 1652,1472 1652,1473.41 1653,1474.41 1653,1614 ; J2.A7 1654.21,1672.7 1654.21,1646.59 1653,1645.38 1653,1614 ; J2.B7 1695.49,1629.49 1680,1614 1653,1614
USB_D_P: J2.A6 J2.B6 R7.1 | length 494.8
  Top Layer w8: R7.1 1520,1420 1578.79,1420 1639,1480.21 1639,1645.38 1638.34,1646.04 1638.34,1672.7 J2.B6 1636.43,1715.43 1644,1723 1668,1723 1675.8,1715.2 J2.A6
VBAT: C19.1 C22.2 C23.2 C24.1 IC4.10 R12.2 R15.1 R26.2 R27.2 S2.6 U2.12 U2.13 | length 1163
  Top Layer w10: R15.1 1340.5,978 1340.5,950.5 1362,929 v1(1387,929) ; R12.2 1372,210.5 U2.13@1372,263
  Top Layer w20: U2.12 1351.79,270.17 C23.2@1493.83,270.17 ; v1(1387,929) 1406,948 C19.1 ; v1(1412,652) 1412,604.57 S2.6 1411.5,603.07 1411.5,478.5 R27.2 1412,474.06 1427.59,458.47 1481.26,404.8 1481.26,368.74 1493.5,356.5 1493.5,270.5 C23.2@1493.83,270.17 ; v1@1555,276 C24.1 ; v1(1562,269) v1(1543,269) 1542.81,268.81 1495.19,268.81 C23.2@1493.83,270.17
  Bottom Layer w20: v1(1387,929) 1387,678 1412,653 v1(1412,652)
pads on no net: IC1.5 IC1.6 IC1.10 IC1.15 IC1.17 IC1.18 IC2.1 IC2.2 IC2.3 IC2.4 IC2.5 IC2.6 IC2.7 IC2.12 IC2.14 IC2.15 IC2.16 IC2.17 IC2.19 IC2.21 IC2.22 IC3.4 IC3.5 IC3.6 IC3.9 IC3.10 IC3.11 IC4.7 J2.A8 J2.B8 JP1.0 S2.4 U2.2

## Polygon pours and split planes (outlines as drawn)
GND on Bottom Layer "GND_L02_P006" (solid, pour order 6): -1,969 -1,1971 1971,1971 1971,-2 -3,-2
NetL1_1 on Bottom Layer "NETL1_1_L02_P001" (solid, pour order 1): 1308.01,290 1308.01,194 1360.01,142 1360.01,86 1366.01,80 1388.01,80 1394.01,86 1394.01,156 1337.01,213 1337.01,281 1328.01,290
NetL1_2 on Bottom Layer "NETL1_2_L02_P000" (solid, pour order 0): 1283,289 1283,193 1231,141 1231,85 1225,79 1203,79 1197,85 1197,155 1254,212 1254,280 1263,289
GND on Top Layer "GND_L01_P007" (solid, remove dead copper, pour order 7): -3,787 -3,1971 1970,1971 1970,4 -5,4
NetC9_2 on Top Layer "NETC9_2_L01_P002" (solid, pour order 2): 1105,295 1166,295 1173,288 1250,288 1249,287 1249,197 1240,188 1200,188 1200,240 1195,245 1104,245

## Keep-outs
Keep-Out Layer:
  lines w10: 0,0 0,1968.5 1968.5,1968.5 1968.5,0 0,0 ; 42.01,395.75 ccw(c105,395.75) 167.99,395.75 167.99,1380 ccw(c105,1380) 42.01,1380 42.01,395.75 ; 1802.8,397.7 ccw(c1865.79,397.7) 1928.78,397.7 1928.78,1381.95 ccw(c1865.79,1381.95) 1802.8,1381.95 1802.8,397.7

## Other copper
Top Layer:
  region net NetL1_1: 1380.01,156 1326.01,156 1326.01,31 1380.01,31
  rectangle net NetL1_2: 1211,31 1265,156
  region net NetL1_1: 1329.82,288 1315,288 1315,217 1329.82,217
  rectangle net NetL1_2: 1261,217 1275.82,288
  pour cut-out: 609,1967 609,1713 1367,1713 1367,1967
  pour cut-out: 1169,163 1422,163 1422,0 1169,0
  region net VBAT: 1520,963 1426,963 1426,933 1474,933 1493,952 1520,952
Bottom Layer:
  pour cut-out: 609,1967 609,1713 1367,1713 1367,1967

## Silkscreen, mask and mechanical layers (free items; w line width, h text height)
Top Overlay:
  circle w6: c1167,816 r1
  circle w6: c1167,816 r11.18
  lines w6: 947.75,600 cw(c1011,600) 1074.25,600 1061.03,613.22 ; 996,680 1011,695 ; 1011,555 1011,695 ; 1026,680 1011,695 ; 1033.5,535 1188.5,535 ; 1074.22,599.97 1087.47,613.22 ; 1128.5,455 1143.5,470 ; 1128.5,485 1143.5,470 ; 1143.5,600 ccw(c1143.5,535) 1143.5,470 ; 1152,736 1167,751 ; 1152,766 1167,751 ; 1175.28,521.78 1188.53,535.03 ; 1175.28,548.22 1188.53,534.97 ; 1183.5,535 1188.5,535 ; 1232,816 ccw(c1167,816) 1167,751
  text "PWR" at 297,1818 h60
  text "ACT" at 398,1818.39 h60
  text "ICM-20948" at 847,1120.44 h60
  text "+Z" at 1242,771 h23.62 r180
  text "Y+" at 1051,675 h23.62
  text "X+" at 1186,495 h23.62 r180
  text "BAT 1C" at 1558,450.52 h80
  text "Li-ion" at 1558,397.59 h80
  text "D" at 214,240 h500
  text "SlimeVR" at 48,116.11 h150
  text "Tracker" at 561,115.67 h90
  text "TerayTech 2023 Jan." at 48,33.84 h80
Top Solder:
  region: 1365.01,160 1328.01,160 1328.01,28 1365.01,28
  rectangle: 1226,28 1263,160
Bottom Solder:
  rectangle: 1520.13,950.06 1617.13,1049.06
  rectangle: 936,936 1033,1035